# Altium PCB audiobound.PcbDoc
Units mm, origin at the board's own origin, x right, y up, seen from the top; angles counter-clockwise.
Board outline 98 x 55 mm, 2 copper layers (Top Layer, Bottom Layer), stack 1.214 mm thick; 79 components, 56 nets, 415 pads, 0 vias.
Unrouted connection lines stored in the file: 17.
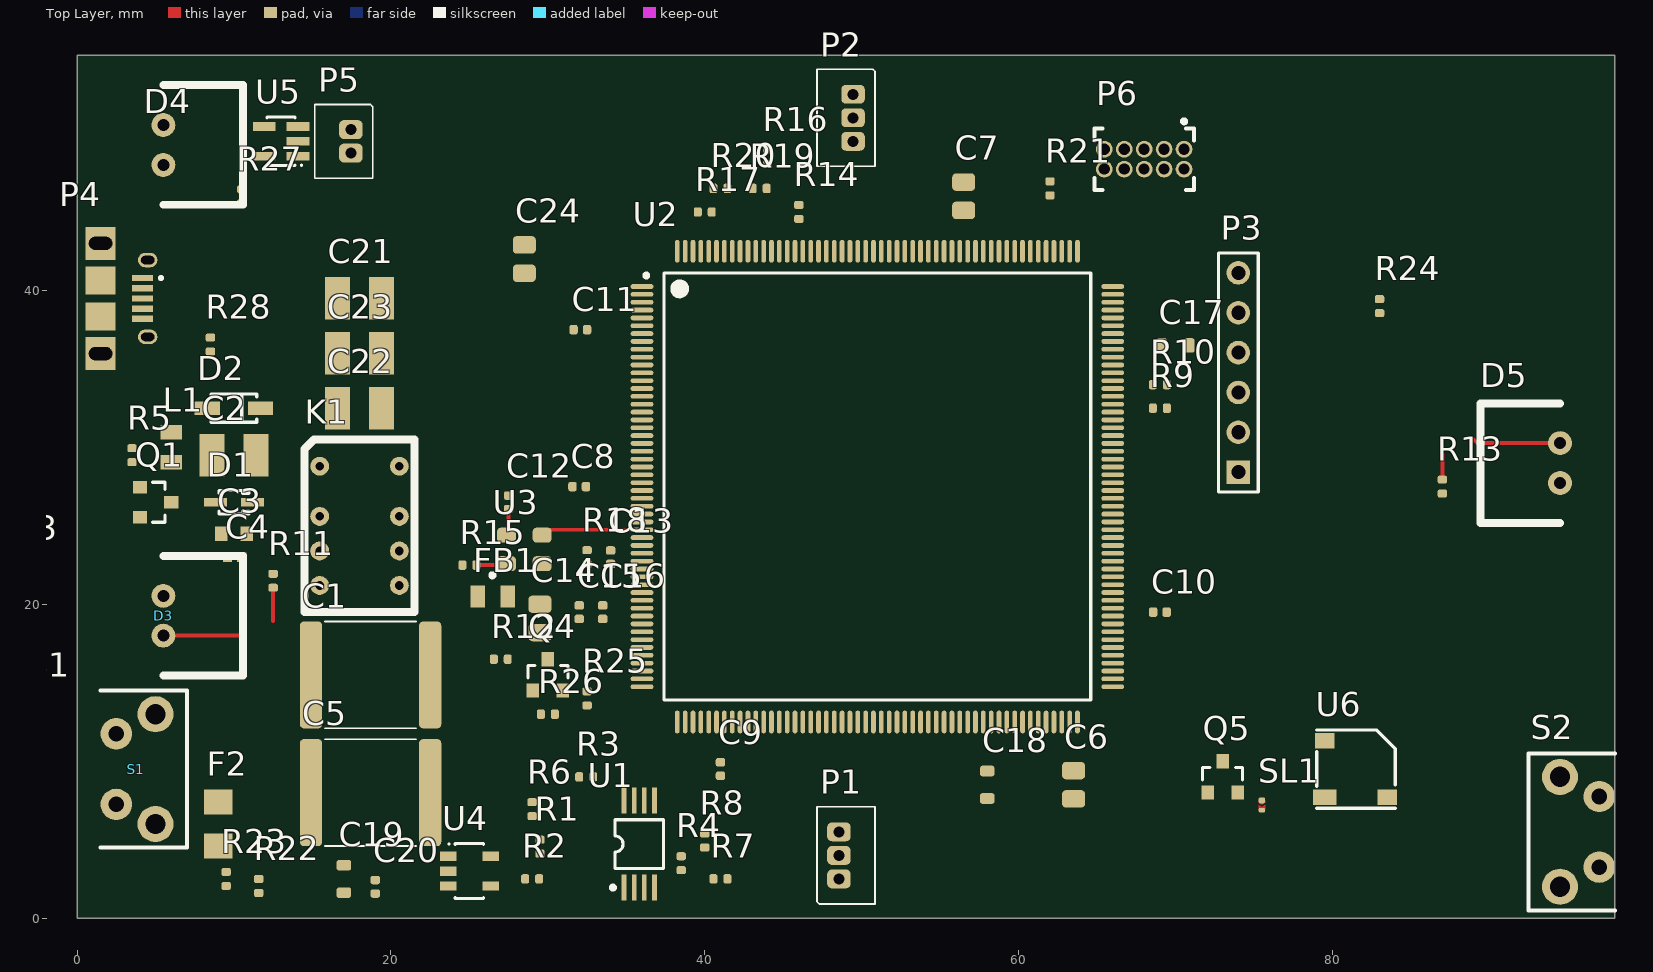
[diagram p0: Top Layer view]
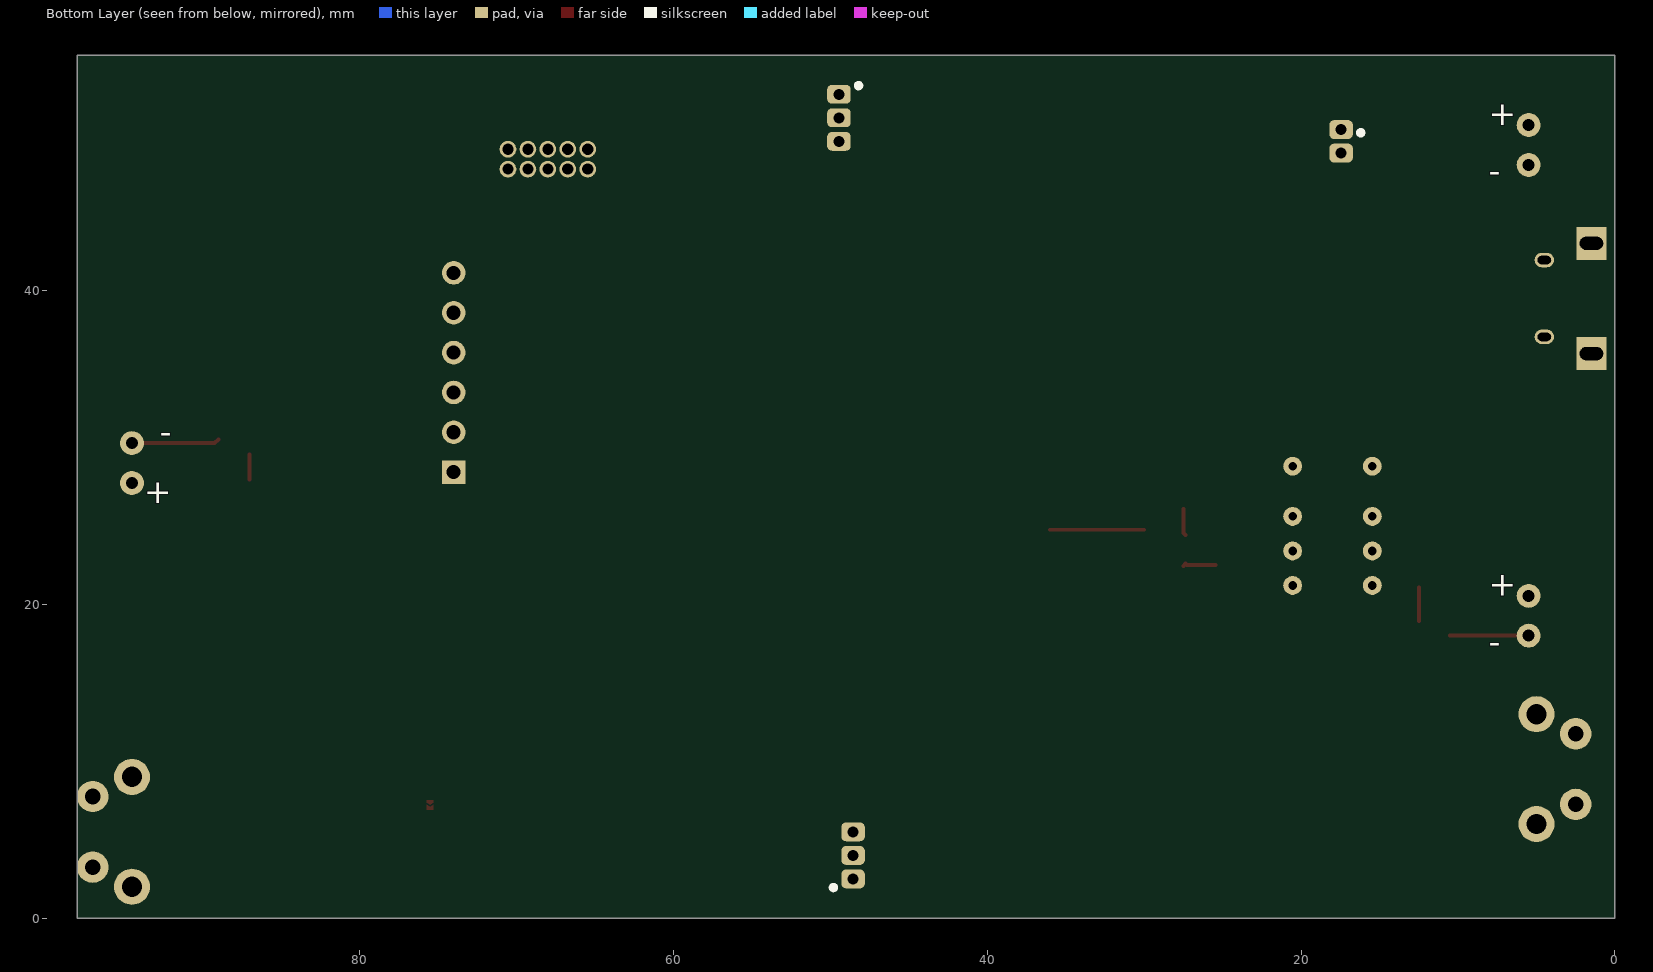
[diagram p1: Bottom Layer view, seen from below]

## Layer stack, top to bottom
Top Solder: solder mask 0.0102, Solder Resist, Dk 3.5
Top Layer: signal copper 0.0356
Dielectric1: core 1.143, FR-4, Dk 4.8
Bottom Layer: signal copper 0.0356
Bottom Solder: solder mask 0.0102, Solder Resist, Dk 3.5

## Board outline
0,0 98,0 98,55 0,55

## Design rules (kind name [scope] priority, off if disabled: settings)
Clearance [All] p1: gap=0.127 ignorepadtopadclearanceinfootprint=FALSE except(0: Arc-Hole Track-Hole SMDPad-Hole THPad-Hole Via-Hole Fill-Hole Poly-Hole Region-Hole Text-Hole)
ComponentClearance [All] p1 off: gap=0.254 collisioncheckmode=3 verticalgap=0.254 showdistances=FALSE
HoleSize [All] p1: absolutevalues=TRUE maxlimit=25.4 minlimit=0.254 maxpercent=80.000 minpercent=20.000
PolygonConnect [All] p1: connectstyle=Direct reliefconductorwidth=0.254 reliefentries=4 polygonreliefangle="90 Angle" airgapwidth=0.254
RoutingVias [All] p1: holewidth=0.711 width=1.27 viastyle="Through Hole" minholewidth=0.711 minwidth=1.27 maxholewidth=0.711 maxwidth=1.27
SilkToSolderMaskClearance SilkscreenOverComponentPads [IsPad] p1: minsilkscreentomaskgap=0.254 clearancetoexposedcopper=TRUE
SolderMaskExpansion [All] p1: expansion=0.102
Width [All] p1: maxlimit=500 minlimit=0.254 preferedwidth=0.254
27 further rules are at their usual default settings.

## Classes and differential pairs
component class main: C1 C2 C3 C4 C5 C21 C22 C23 D1 D2 K1 L1 P1 P2 Q1 R1 R2 R3 R4 R5 R6 R7 R8 SL1 U1
component class mcu: C6 C7 C8 C9 C10 C11 C12 C13 C14 C15 C16 C17 C18 D3 D5 FB1 P3 P6 Q4 Q5 R9 R10 R11 R12 R13 R14 R15 R16 R17 R18 R19 R20 R21 R24 R25 R26 S2 U2 U3 U6
component class power: C19 C20 C24 D4 F2 P4 P5 R22 R23 R27 R28 S1 U4 U5

## Components (designator, comment, footprint, x,y, rotation, side; value= is the part's Value field where it differs from the comment)
C1 "C7563X7S1C107M280LE" CAPC7563X300L40N 18.705,15.5 r180 top value=100uF
C2 "GRM32EC81C476KE15L" 1210 10,29.5 r0 top value=47uF
C3 "CL10A106MA8NRNC" 0603 10,24.5 r0 top value=10uF
C4 "GRM155R71C104KA88J" 0402 10.045,23 r180 top value=100nF
C5 "C7563X7S1C107M280LE" CAPC7563X300L40N 18.705,8 r180 top value=100uF
C6 "C2012X7S1A226M125" CAPC200X125X145L45N 63.5,8.5 r270 top value=22uF
C7 "C2012X7S1A226M125" CAPC200X125X145L45N 56.5,46 r90 top value=22uF
C8 "GCM155R71H104KE02" CAPC100X50X55L25N 32,27.5 r0 top value=100nF
C9 "GCM155R71H104KE02" CAPC100X50X55L25N 41,9.5 r90 top value=100nF
C10 "GCM155R71H104KE02" CAPC100X50X55L25N 69,19.5 r180 top value=100nF
C11 "GCM155R71H104KE02" CAPC100X50X55L25N 32.07,37.5 r0 top value=100nF
C12 "GCM155R71H104KE02" CAPC100X50X55L25N 27.5,26.5 r270 top value=100nF
C13 "GRM155R71H103KA88" CAPC100X50X55L25N 34,23 r90 top value=10nF
C14 "C2012X7S1A226M125" CAPC200X125X145L45N 29.5,19.1 r270 top value=22uF
C15 "GCM155R71H104KE02" CAPC100X50X55L25N 32,19.5 r90 top value=100nF
C16 "GRM155R71H103KA88" CAPC100X50X55L25N 33.5,19.5 r90 top value=10nF
C17 "C1608X7R1A225M080" CAPC160X80X90L20N 70,36.5 r180 top value=2.2uF
C18 "C1608X7R1A225M080" CAPC160X80X90L20N 58,8.5 r90 top value=2.2uF
C19 "C1608X7R1A225M080" CAPC160X80X90L20N 17,2.5 r90 top value=2.2uF
C20 "GRM155R71H103KA88" CAPC100X50X55L25N 19,2 r90 top value=10nF
C21 "GRM32EC81C476KE15L" 1210 18,39.5 r180 top value=47uF
C22 "GRM32EC81C476KE15L" 1210 18,32.5 r180 top value=47uF
C23 "GRM32EC81C476KE15L" 1210 18,36 r180 top value=47uF
C24 "C2012X7S1A226M125" CAPC200X125X145L45N 28.5,42 r90 top value=22uF
D1 "1N4448HWS-7-F" SOD323 10,26.5 r0 top
D2 "DDZ9694-7" SOD123 10,32.5 r0 top
D3 "5300H1" 5300Hx 5.5,19.27 r0 top
D4 "5300H3" 5300Hx 5.5,49.27 r0 top
D5 "5300H5" 5300Hx 94.5,29 r180 top
F2 "0ZCJ0020FF2E" 1206 9,6 r270 top
FB1 "742792031" 0805 26.5,20.5 r180 top value="300 Ohm @ 100 MHz"
K1 "IM01TS" IM01TS 18,25 r270 top
L1 "KLZ2012NHR101LTD25" 0805 6,30 r270 top value=100uH
P1 "B3B-ZR" B3B-ZR 49,4 r270 top
P2 "B3B-ZR" B3B-ZR 49,51 r90 top
P3 "PEC06SFAN" HDR1X6 74,28.42 r90 top
P4 "ZX62D-B-5PA8" ZX62D-B-5PA8 1.65,39.488 r270 top
P5 "B2B-ZR(LF)(SN)" B2B-ZR 17,49.5 r90 top
P6 "GRPB052VWVN" GRPB052VWVN 68,48.365 r270 top
Q1 "MMBT4401-7-F" SOT23 5,26.5 r270 top
Q4 "2N7002-7-F" SOT23 30,15.5 r0 top
Q5 "2N7002-7-F" SOT23 73,9 r0 top
R1 "ERJ-2RKF4700X" RESC1005X40N 29.5,4.555 r90 top value=470
R2 "ERJ-2RKF1001X" RESC1005X40N 29,2.5 r0 top value=1k
R3 "ERJ-2RKF1003X" RESC1005X40N 32.445,9 r0 top value=100k
R4 "ERJ-2RKF1002X" RESC1005X40N 38.5,3.5 r90 top value=10k
R5 "ERJ-2RKF3301X" RESC1005X40N 3.5,29.5 r90 top value=3.3k
R6 "ERJ-2RKF1003X" RESC1005X40N 29,6.945 r90 top value=100k
R7 "ERJ-2RKF1003X" RESC1005X40N 41,2.5 r0 top value=100k
R8 "ERJ-2RKF1001X" RESC1005X40N 40,4.945 r270 top value=1k
R9 "ERJ-2RKF2400X" RESC1005X40N 69,32.5 r0 top value=240
R10 "ERJ-2RKF2400X" RESC1005X40N 69,34 r0 top value=240
R11 "ERJ-2RKF2400X" RESC1005X40N 12.5,21.5 r90 top value=240
R12 "ERJ-2RKF2400X" RESC1005X40N 27,16.5 r0 top value=240
R13 "ERJ-2RKF2400X" RESC1005X40N 87,27.5 r270 top value=240
R14 "ERJ-2RKF1002X" RESC1005X40N 46,45 r90 top value=10k
R15 "ERJ-2RKF1002X" RESC1005X40N 25,22.5 r180 top value=10k
R16 "ERJ-2RKF1002X" RESC1005X40N 44,48.5 r90 top value=10k
R17 "ERJ-2RKF1002X" RESC1005X40N 40,45 r180 top value=10k
R18 "ERJ-2RKF1002X" RESC1005X40N 32.5,23 r270 top value=10k
R19 "ERJ-2RKF1002X" RESC1005X40N 43.5,46.5 r0 top value=10k
R20 "ERJ-2RKF1002X" RESC1005X40N 41,46.5 r180 top value=10k
R21 "ERJ-2RKF4701X" RESC1005X40N 62,46.5 r90 top value=4.7k
R22 "ERJ-2RKF1002X" RESC1005X40N 11.58,2.055 r90 top value=10k
R23 "ERJ-2RKF1002X" RESC1005X40N 9.5,2.5 r90 top value=10k
R24 "ERJ-2RKF1002X" RESC1005X40N 83,39 r90 top value=10k
R25 "ERJ-2RKF1000X" RESC1005X40N 32.5,14 r270 top value=100
R26 "ERJ-2RKF1002X" RESC1005X40N 30,13 r0 top value=10k
R27 "ERJ-2RKF4700X" RESC1005X40N 10.5,46 r90 top value=470
R28 "ERJ-2RKF2201X" RESC1005X40N 8.5,36.555 r270 top value=2.2k
S1 "EVQ-PF006K" EVQ-PF006K 2.5,9.5 r270 top
S2 "EVQ-PF006K" EVQ-PF006K 97,5.5 r90 top
SL1 "SOLDER_LINK_BRIDGED" SOLDERLINK0603X26N_BRIDGED 75.5,7.215 r90 top value=0
U1 "OP262" TSSOP8 35.825,4.725 r0 top
U2 "STM32F746BG" LQFP208 51,27.5 r0 top
U3 "KC3225A25.0000C3GE00" OSCCC320X250X80L75X100N 28.5,23.5 r0 top
U4 "LP3985IM5-3.0" DBV-5 25,3 r90 top
U5 "MCP73831T-2ACI/OT" SOT23-5 13,49.5 r90 top
U6 "CSS-0578" CSS-0578 81.5,9.5 r0 top

## Footprints (in the part's own frame and the unit in brackets; to place one, negate y for a bottom-side part, rotate by r counter-clockwise, add the part's x,y. Pads: shape width x height; smd on the part's side, far side on the other; paste and mask are expansions set on the pad)
0402 [mm] "SMD; Body 1 x 0.5 mm (LxW typ)"
  rect 0.59x0.6 smd: 1(-0.455,0) 2(0.455,0)
  body extent -0.5,-0.25 0.5,0.25, height 0.6
0603 [mm] "SMD; Body 1.6 x 0.9 mm (LxW typ)"
  rect 0.79x0.93 smd: 1(-0.82,0) 2(0.82,0)
  body extent -0.8,-0.4 0.8,0.4, height 0.9
0805 [mm] "SMD; Body 2 x 1.2 mm (LxW typ)"
  rect 0.92x1.38 smd: 1(-0.955,0) 2(0.955,0)
  body extent -1,-0.63 1,0.63, height 1.2
1206 [mm] "SMD; Body 3.1 x 1.6 mm (LxW typ)"
  rect 1.6x1.8 smd: 1(-1.4,0) 2(1.4,0)
  body extent -1.63,-0.79 1.57,0.81, height 1
1210 [mm] "SMD; Body 3.2 x 2.5 mm (LxW typ)"
  rect 1.6x2.7 smd: 1(-1.4,0) 2(1.4,0)
  body extent -1.6,-1.27 1.6,1.23, height 1.5
5300Hx [mil]
  round 60 hole 30: 1(0,50) 2(0,-50)
  silkscreen extent 0,-150 200,150, body extent -385,-117 145,117, height 235
B2B-ZR [mm]
  rrect50% 1.2x1.5 hole 0.7 paste-1.5 mask+0.05: 1(0.75,-0.45) 2(-0.75,-0.45)
  silkscreen extent -2.35,-1.85 2.35,1.85, body extent -2.25,-1.75 2.25,1.75, height 4.5
B3B-ZR [mm]
  rrect50% 1.2x1.5 hole 0.7 paste-1.5 mask+0.05: 1(1.5,-0.45) 2(0,-0.45) 3(-1.5,-0.45)
  silkscreen extent -3.1,-1.85 3.1,1.85, body extent -3,-1.75 3,1.75, height 4.5
CAPC100X50X55L25N [mm] "Capacitor, Chip; 1.00 mm L X 0.50 mm W X 0.55 mm H body"
  rrect52% 0.54x0.6 smd: 1(-0.43,0) 2(0.43,0)
  body extent -0.5,-0.25 0.5,0.25, height 0.55
CAPC160X80X90L20N [mm] "Capacitor, Chip; 1.60 mm L X 0.80 mm W X 0.90 mm H body"
  rrect50% 0.68x0.93 smd: 1(-0.875,0) 2(0.875,0)
  body extent -0.8,-0.4 0.8,0.4, height 0.9
CAPC200X125X145L45N [mm] "Capacitor, Chip; 2.00 mm L X 1.25 mm W X 1.45 mm H body"
  rrect45% 1.11x1.47 smd: 1(-0.9,0) 2(0.9,0)
  body extent -1,-0.63 1,0.63, height 1.45
CAPC7563X300L40N [mm] "Capacitor, Chip; 7.50 mm L X 6.30 mm W X 3.00 mm H body"
  rrect35% 1.42x6.81 smd: 1(-3.795,0) 2(3.795,0)
  silkscreen extent -2.91,-3.4 2.91,3.4, body extent -3.75,-3.15 3.75,3.15, height 3
CSS-0578 [mm] "Magnetic Buzzer"
  rect 1.5x1 smd paste-0.025 mask+0.07: 1(-2,-1.8)
  rect 1.25x1 smd paste-0.025 mask+0.07: 2(2,-1.8) 3(-2,1.8)
  silkscreen extent -2.5,-2.5 2.5,2.5, body extent -2.5,-2.5 2.5,2.5, height 3
DBV-5 [mm]
  rect 0.6x1.05 smd: 1(0.95,1.35) 2(0,1.35) 3(-0.95,1.35) 4(-0.95,-1.35) 5(0.95,-1.35)
  silkscreen extent -1.75,-0.9 1.77,1.35, body extent -1.5,-1.5 1.5,1.5, height 1.3
EVQ-PF006K [mm] "Light Touch Switch"
  round 2 hole 1: 1(-2.25,0) 2(2.25,0)
  round 2.3 hole 1.3: 3(-3.5,2.5) 3(3.5,2.5)
  silkscreen extent -5,-1 5,4.5, body extent -4.29,-5.85 4.29,4, height 7.4
GRPB052VWVN [mil] "Male Header, 0.050\" Pitch, 2x5 Position"
  round 42 hole 28 mask+2: 1(-25,100) 2(25,100) 3(-25,50) 4(25,50) 5(-25,0) 6(25,0) 7(-25,-50) 8(25,-50) 9(-25,-100) 10(25,-100)
  silkscreen extent -100,-125 77,125, body extent -67,-125 67,125, height 157
HDR1X6 [mm] "Connector; Header; 6 Position"
  rect 1.5x1.5 hole 0.9: 1(0,0)
  round 1.5 hole 0.9: 2(2.54,0) 3(5.08,0) 4(7.62,0) 5(10.16,0) 6(12.7,0)
  silkscreen extent -1.27,-1.27 13.97,1.27
IM01TS [mm]
  round 1.2 hole 0.55: 1(-3.8,-2.54) 2(-0.6,-2.54) 3(1.6,-2.54) 4(3.8,-2.54) 5(3.8,2.54) 6(1.6,2.54) 7(-0.6,2.54) 8(-3.8,2.54)
  silkscreen extent -5.5,-3.5 5.5,3.5, body extent -5,-3 5,3, height 4.65
LQFP208 [mm] "TSQFP, 208-Leads, Body 28.00x28.00mm, Pitch 0.50mm, IPC Medium Density"
  oval 1.45x0.3 smd: 1(-15,12.75) 2(-15,12.25) 3(-15,11.75) 4(-15,11.25) 5(-15,10.75) 6(-15,10.25) 7(-15,9.75) 8(-15,9.25) 9(-15,8.75) 10(-15,8.25) 11(-15,7.75) 12(-15,7.25) 13(-15,6.75) 14(-15,6.25) 15(-15,5.75) 16(-15,5.25) 17(-15,4.75) 18(-15,4.25) 19(-15,3.75) 20(-15,3.25) 21(-15,2.75) 22(-15,2.25) 23(-15,1.75) 24(-15,1.25) 25(-15,0.75) 26(-15,0.25) 27(-15,-0.25) 28(-15,-0.75) 29(-15,-1.25) 30(-15,-1.75) 31(-15,-2.25) 32(-15,-2.75) 33(-15,-3.25) 34(-15,-3.75) 35(-15,-4.25) 36(-15,-4.75) 37(-15,-5.25) 38(-15,-5.75) 39(-15,-6.25) 40(-15,-6.75) 41(-15,-7.25) 42(-15,-7.75) 43(-15,-8.25) 44(-15,-8.75) 45(-15,-9.25) 46(-15,-9.75) 47(-15,-10.25) 48(-15,-10.75) 49(-15,-11.25) 50(-15,-11.75) 51(-15,-12.25) 52(-15,-12.75) 105(15,-12.75) 106(15,-12.25) 107(15,-11.75) 108(15,-11.25) 109(15,-10.75) 110(15,-10.25) 111(15,-9.75) 112(15,-9.25) 113(15,-8.75) 114(15,-8.25) 115(15,-7.75) 116(15,-7.25) 117(15,-6.75) 118(15,-6.25) 119(15,-5.75) 120(15,-5.25) 121(15,-4.75) 122(15,-4.25) 123(15,-3.75) 124(15,-3.25) 125(15,-2.75) 126(15,-2.25) 127(15,-1.75) 128(15,-1.25) 129(15,-0.75) 130(15,-0.25) 131(15,0.25) 132(15,0.75) 133(15,1.25) 134(15,1.75) 135(15,2.25) 136(15,2.75) 137(15,3.25) 138(15,3.75) 139(15,4.25) 140(15,4.75) 141(15,5.25) 142(15,5.75) 143(15,6.25) 144(15,6.75) 145(15,7.25) 146(15,7.75) 147(15,8.25) 148(15,8.75) 149(15,9.25) 150(15,9.75) 151(15,10.25) 152(15,10.75) 153(15,11.25) 154(15,11.75) 155(15,12.25) 156(15,12.75)
  oval 0.3x1.45 smd: 53(-12.75,-15) 54(-12.25,-15) 55(-11.75,-15) 56(-11.25,-15) 57(-10.75,-15) 58(-10.25,-15) 59(-9.75,-15) 60(-9.25,-15) 61(-8.75,-15) 62(-8.25,-15) 63(-7.75,-15) 64(-7.25,-15) 65(-6.75,-15) 66(-6.25,-15) 67(-5.75,-15) 68(-5.25,-15) 69(-4.75,-15) 70(-4.25,-15) 71(-3.75,-15) 72(-3.25,-15) 73(-2.75,-15) 74(-2.25,-15) 75(-1.75,-15) 76(-1.25,-15) 77(-0.75,-15) 78(-0.25,-15) 79(0.25,-15) 80(0.75,-15) 81(1.25,-15) 82(1.75,-15) 83(2.25,-15) 84(2.75,-15) 85(3.25,-15) 86(3.75,-15) 87(4.25,-15) 88(4.75,-15) 89(5.25,-15) 90(5.75,-15) 91(6.25,-15) 92(6.75,-15) 93(7.25,-15) 94(7.75,-15) 95(8.25,-15) 96(8.75,-15) 97(9.25,-15) 98(9.75,-15) 99(10.25,-15) 100(10.75,-15) 101(11.25,-15) 102(11.75,-15) 103(12.25,-15) 104(12.75,-15) 157(12.75,15) 158(12.25,15) 159(11.75,15) 160(11.25,15) 161(10.75,15) 162(10.25,15) 163(9.75,15) 164(9.25,15) 165(8.75,15) 166(8.25,15) 167(7.75,15) 168(7.25,15) 169(6.75,15) 170(6.25,15) 171(5.75,15) 172(5.25,15) 173(4.75,15) 174(4.25,15) 175(3.75,15) 176(3.25,15) 177(2.75,15) 178(2.25,15) 179(1.75,15) 180(1.25,15) 181(0.75,15) 182(0.25,15) 183(-0.25,15) 184(-0.75,15) 185(-1.25,15) 186(-1.75,15) 187(-2.25,15) 188(-2.75,15) 189(-3.25,15) 190(-3.75,15) 191(-4.25,15) 192(-4.75,15) 193(-5.25,15) 194(-5.75,15) 195(-6.25,15) 196(-6.75,15) 197(-7.25,15) 198(-7.75,15) 199(-8.25,15) 200(-8.75,15) 201(-9.25,15) 202(-9.75,15) 203(-10.25,15) 204(-10.75,15) 205(-11.25,15) 206(-11.75,15) 207(-12.25,15) 208(-12.75,15)
  silkscreen extent -14.85,-13.6 13.6,13.6, body extent -15.31,-15.31 15.31,15.31, height 3.44
OSCCC320X250X80L75X100N [mm] "Oscillator, Corner Concave; 3.20 mm L X 2.50 mm W X 0.80 mm H body"
  rrect51% 1.2x0.95 smd: 1(-1.135,-0.91) 2(1.135,-0.91) 3(1.135,0.91) 4(-1.135,0.91)
  silkscreen extent -2.16,-1.78 -1.91,-1.52, body extent -1.6,-1.25 1.6,1.25, height 0.8
RESC1005X40N [mm] "Resistor, Chip; 1.00 mm L X 0.50 mm W X 0.40 mm H body"
  rrect50% 0.51x0.6 smd: 1(-0.445,0) 2(0.445,0)
  body extent -0.5,-0.25 0.5,0.25, height 0.4
SOD123 [mm] "SOD-123; 2 Leads; Body 2.7 x 1.6 mm, (LxW)"
  rect 1.6x0.85 smd: 1(-1.7,0) 2(1.7,0)
  silkscreen extent -1.45,-0.9 1.45,0.9, body extent -1.92,-0.85 1.92,0.85, height 1.45
SOD323 [mm] "SOD-323/SC-76; 2 Leads; Body 1.7 x 1.3 mm, (LxW)"
  rect 1.45x0.55 smd: A(-1.175,0) K(1.175,0)
  silkscreen extent -0.95,-0.75 0.95,0.75, body extent -1.35,-0.7 1.25,0.65, height 1.1
SOLDERLINK0603X26N_BRIDGED [mm] "Resistor, Chip; Bridged; 0.60 mm L X 0.30 mm W X 0.26 mm H body"
  rrect50% 0.27x0.4 smd paste-0.4 mask+0.05: 1(-0.335,0)
  rrect50% 0.37x0.4 smd paste-0.4 mask+0.05: 2(0.285,0)
  Top Layer region: 0.138,0.2 0.012,0 0.138,-0.2 0.298,-0.2 0.298,0.2
  Top Layer region: 0.013,-0.2 -0.112,0 0.013,0.2 -0.298,0.2 -0.298,-0.2
SOT23 [mm] "SOT-23; 3 Leads; Body 3.0 x 2.5 mm, inc. leads (LxW max)"
  rect 0.8x0.9 smd: 1(-0.95,-1) 2(0.95,-1) 3(0,1)
  silkscreen extent -1.27,-0.2 1.28,0.6, body extent -1.46,-1.14 1.46,1.2, height 1
SOT23-5 [mm] "SOT-23/SC-74A; 5 Leads; Body 3 x 3 mm, inc. leads (LxW max)"
  rect 0.55x1.45 smd: 1(-0.95,-1.075) 2(0,-1.075) 3(0.95,-1.075) 4(0.95,1.075) 5(-0.95,1.075)
  silkscreen extent -1.57,-1.35 1.55,0.9, body extent -1.45,-1.4 1.45,1.4, height 1.45
TSSOP8 [mm] "Thin-Shrink Small Outline Package, 8-pin"
  rect 0.3x1.65 smd: 1(-0.975,-2.775) 2(-0.325,-2.775) 3(0.325,-2.775) 4(0.975,-2.775) 5(0.975,2.775) 6(0.325,2.775) 7(-0.325,2.775) 8(-0.975,2.775)
  silkscreen extent -1.8,-2.9 1.55,1.55, body extent -1.55,-3.2 1.55,3.2, height 1.1
ZX62D-B-5PA8 [mm] "USB Micro-B SMD Connector"
  rect 0.4x1.35 smd: 1(-1.3,2.525) 2(-0.65,2.525) 3(0,2.525) 4(0.65,2.525) 5(1.3,2.525)
  rect 2.1x1.9 hole 0.825 slot 1.5 at 90 deg: 6(-3.512,-0.15) 9(3.512,-0.15)
  rect 1.8x1.9 smd: 7(-1.15,-0.15) 8(1.15,-0.15)
  oval 0.925x1.25 hole 0.525 slot 0.85 at 90 deg: 10(-2.45,2.85) 11(2.45,2.85)
  silkscreen extent -1.4,3.6 -1.2,3.8, body extent -4.05,-2.9 4.05,2.9, height 2.75

## Part data
C1 C5: library part CAP, "Ceramic Capacitor 100uF ±20% 16V X7S 3025", Manufacturer=TDK, Package=3025, Tolerance=±20%, Voltage=16V, Manufacturer P/N=C7563X7S1C107M280LE, Tr=-55:125
C2 C21 C22 C23: library part CAP, "Ceramic Capacitor 47uF ±10% 16V X6S 1210", Manufacturer=Murata, Package=1210, Tolerance=±10%, Voltage=16V, Manufacturer P/N=GRM32EC81C476KE15L, Tr=-55:105
C3: library part "CAP 0603", "Ceramic Capacitor 10uF ±20% 25V X5R 0603", Manufacturer=Samsung, Package=0603, Tolerance=±20%, Voltage=25V, Manufacturer P/N=CL10A106MA8NRNC, Tr=-55:85
C4: library part "CAP 0402", "Ceramic Capacitor 100nF ±10% 16V X7R 0402", Manufacturer=Murata, Package=0402, Tolerance=±10%, Voltage=16V, Manufacturer P/N=GRM155R71C104KA88J, Tr=-55:125
C6 C7 C14 C24: library part CAP, "Ceramic Capacitor 22uF ±20% 10V X7S 0805", Manufacturer=TDK, Package=0805, Tolerance=±20%, Voltage=10V, Manufacturer P/N=C2012X7S1A226M125, Tr=-55:125
C8 C9 C10 C11 C12 C15: library part CAP, "Ceramic Capacitor 100nF ±10% 50V X7R 0402", Manufacturer=Murata, Package=0402, Tolerance=±10%, Voltage=50V, Manufacturer P/N=GCM155R71H104KE02, Tr=-55:125
C13 C16 C20: library part CAP, "Ceramic Capacitor 10nF ±10% 50V X7R 0402", Manufacturer=Murata, Package=0402, Tolerance=±10%, Voltage=50V, Manufacturer P/N=GRM155R71H103KA88, Tr=-55:125
C17 C18 C19: library part CAP, "Ceramic Capacitor 2.2uF ±20% 10V X7R 0603", Manufacturer=TDK, Package=0603, Tolerance=±20%, Voltage=10V, Manufacturer P/N=C1608X7R1A225M080, Tr=-55:125
D1: "Schottky Diode 80V 250mA SOD323", Manufacturer="Diodes, Inc.", Alternative P/N=1N4448, Manufacturer P/N=1N4448HWS-7-F
D2: "Zener Diode 8.2V 500mW SOD123", Manufacturer="Diodes, Inc.", Package=SOD123, Manufacturer P/N=DDZ9694-7, Vz=8.2V
D3: library part LED0603RD, "LED, Color Red, 10mA, 2.0V", Manufacturer="Visual Communications Company", Manufacturer P/N=5300H1
D4: library part LED0603RD, "LED, Color Amber, 10mA, 2.0V", Manufacturer="Visual Communications Company", Manufacturer P/N=5300H3
D5: library part LED0603RD, "LED, Color Green, 10mA, 2.2V", Manufacturer="Visual Communications Company", Manufacturer P/N=5300H5
F2: "PTC Resettable Fuse, 0.2A, 30V, SMD 1206", Manufacturer="Bell Fuse", Manufacturer P/N=0ZCJ0020FF2E
FB1: library part INDUCTOR, "Ferrite Chip 300 Ohm @ 100MHz; 3A", Manufacturer="Wurth Electronics, Inc", Package=0805, I(sat)=3A, Manufacturer P/N=742792031
K1: "Dual-Pole Dual-Throw Relay", Manufacturer=IM01TS
L1: library part INDUCTOR, "Inductor 100uH ±20% 140mA 0805", Manufacturer=TDK, Package=0805, Tolerance=±20%, I(sat)=0.03, Manufacturer P/N=KLZ2012NHR101LTD25, Tr=-55:150
P1 P2: library part "Header 3", "Header, 3-Pin", Manufacturer=JST, Manufacturer P/N=B3B-ZR
P3: library part "Header 6", "Header, 6-Pin", Manufacturer=Sullins, Do Not Place=DNP, Manufacture P/N=PEC06SFAN
P4: "USB Micro-B SMD Connector", Manufacturer=Hirose, Manufacturer P/N=ZX62D-B-5PA8
P5: library part "Header 2", "Header, 2-Pin", Manufacturer=JST, Manufacturer P/N=B2B-ZR(LF)(SN)
P6: "Male Header, 0.050\" Pitch, 2x5 Position, Right Angle", Manufacturer=Sullins, Manufacturer P/N=GRPB052MWCN, Do Not Place=DNP
Q1: "NPN Small Signal Transistor SMD SOT-23", Manufacturer="Diodes, Inc.", Manufacturer P/N=MMBT4401-7-F
Q4 Q5: "N-Channel Enhancement Mode MOSFET", Manufacturer="Diodes, Inc.", Manufacturer P/N=2N7002-7-F
R1 R27: library part RES, "Thick Film Resistor 470 ±1% 0.1W 50V 0402", Manufacturer=Panasonic, Package=0402, Power=0.1, Tolerance=±1%, Voltage=50, Manufacturer P/N=ERJ-2RKF4700X, Tcr=±100, Tr=-55:155
R2 R8: library part RES, "Thick Film Resistor 1k ±1% 0.1W 50V 0402", Manufacturer=Panasonic, Package=0402, Power=0.1, Tolerance=±1%, Voltage=50, Manufacturer P/N=ERJ-2RKF1001X, Tcr=±100, Tr=-55:155
R3 R6 R7: library part RES, "Thick Film Resistor 100k ±1% 0.1W 50V 0402", Manufacturer=Panasonic, Package=0402, Power=0.1, Tolerance=±1%, Voltage=50, Manufacturer P/N=ERJ-2RKF1003X, Tcr=±100, Tr=-55:155
R4 R14 R15 R16 R17 R18 R19 R20 R22 R23 R24 R26: library part RES, "Thick Film Resistor 10k ±1% 0.1W 50V 0402", Manufacturer=Panasonic, Package=0402, Power=0.1, Tolerance=±1%, Voltage=50, Manufacturer P/N=ERJ-2RKF1002X, Tcr=±100, Tr=-55:155
  R16 R20: Do Not Place=DNP
R5: library part RES, "Thick Film Resistor 3.3k ±1% 0.1W 50V 0402", Manufacturer=Panasonic, Package=0402, Power=0.1, Tolerance=±1%, Voltage=50, Manufacturer P/N=ERJ-2RKF3301X, Tcr=±100, Tr=-55:155
R9 R10 R11 R12 R13: library part RES, "Thick Film Resistor 240 ±1% 0.1W 75V 0402", Manufacturer=Panasonic, Package=0402, Power=0.1, Tolerance=±1%, Voltage=75, Manufacturer P/N=ERJ-2RKF2400X, Tcr=±100, Tr=-55:155
R21: library part RES, "Thick Film Resistor 4.7k ±1% 0.1W 75V 0402", Manufacturer=Panasonic, Package=0402, Power=0.1, Tolerance=±1%, Voltage=75, Manufacturer P/N=ERJ-2RKF4701X, Tcr=±100, Tr=-55:155
R25: library part RES, "Thick Film Resistor 100 ±1% 0.1W 75V 0402", Manufacturer=Panasonic, Package=0402, Power=0.1, Tolerance=±1%, Voltage=75, Manufacturer P/N=ERJ-2RKF1000X, Tcr=±100, Tr=-55:155
R28: library part RES, "Thick Film Resistor 2.2k ±1% 0.1W 50V 0402", Manufacturer=Panasonic, Package=0402, Power=0.1, Tolerance=±1%, Voltage=50, Manufacturer P/N=ERJ-2RKF2201X, Tcr=±100, Tr=-55:155
S1 S2: "Tactile Switch; Normally Open", Manufacturer=Panasonic, Manufacturer P/N=EVQ-PF006K
SL1: library part RES, "Solder Link Bridged"
U1: "Dual 15 MHz Rail-to-Rail Op Amp", Manufacturer="Analog Devices", Manufacturer P/N=OP262HRU
U2: library part STM32F746BGT6, "STM32 Microcontroller", Manufacturer="ST Microelectronics", Manufacturer P/N=STM32F746BG
U3: library part OSC_25M_NZ2520SB, "Oscillator 25.00Mhz, -+50PPM, 3.3V", Manufacturer=Kyocera, Manufacturer P/N=KC3225A25.0000C3GE00
U4: library part LP3985IM5-2.5, "Low Dropout Regulator, Fixed, 150mA, 30uV Low Noise, 3.0V", Manufacturer="Texas Instruments", Voltage=3.0V, Manufacturer P/N=LP3985IM5-3.0
U5: "Single-Cell LiPo Charger", Manufacturer=Microchip, Manufacturer P/N=MCP73831T-2ACI/OT
U6: "Magnetic Buzzer", Manufacturer=CUI, Manufacturer P/N=CSS-0578

## Nets (pads, with @x,y where several pads share a name; then routed paths per layer and width w, separated by ;. In a path a pad name is that pad's centre, name@x,y a point inside that pad or via, vN(x,y) a via of type N, cw(c..) or ccw(c..) an arc to the next point about the centre after c; other vN are vias at no path point)
ADC: R7.1 U1.7 U2.50
BAT-SNS: Q4.2 R25.1 U2.44
BAT-SNS-EN: Q4.1 R26.1 U2.45
BOOST: R5.2 U2.56
BOOT: R16.1 R19.2 U2.197
BUZZER: Q5.1 U2.100
CAL: R24.1 S2.1 U2.43
DAC: U1.3 U2.53
GND: C2.1 C3.1 C4.2 C6.2 C7.2 C8.1 C9.1 C10.1 C11.1 C12.1 C13.1 C14.2 C15.1 C16.1 C17.1 C18.1 C20.1 C21.1 C22.1 C23.1 C24.2 D2.1 K1.8 P1.3 P2.3 P3.6 P4.5 P4.6 P4.7 P4.8 P4.9 P4.10 P4.11 P5.2 P6.1 Q1.2 Q5.2 R6.1 R8.1 R11.2 R13.2 R19.1 R20.1 R22.1 R23.2 R24.2 R25.2 R26.2 R28.2 S1.3 S2.3 U1.4 U2.14 U2.25 U2.40 U2.51 U2.60 U2.72 U2.82 U2.93 U2.114 U2.125 U2.136 U2.149 U2.170 U2.184 U2.202 U3.2 U4.2 U5.2
JTRST_N: R14.1 U2.193
KICK-ON-OFF: C19.1 R22.2 U2.199 U4.3
MCU_LED0: D3.1 U2.61
MCU_LED1: D5.1 U2.62
MCU_OSC: U2.32 U3.3 | length 6
  Top Layer w0.254: U3.3@30,24.75 U2.32
MCU_RST_N: C13.2 R18.1 U2.34
MIC: C5.2 K1.4 SL1.2
MOM-ON-OFF: C19.2 R23.1 S1.2 U2.90
NetC1_2: C1.2 U1.1 U1.2
NetC5_1: C5.1 R3.1 R6.2 U1.5
NetC14_1: C14.1 C15.2 C16.2 FB1.1 U2.41 U2.42
NetC17_2: C17.2 U2.148
NetC18_2: C18.2 U2.92
NetC20_2: C20.2 U4.4
NetC24_1: C24.1 D4.1 P4.1 U5.4
NetD1_A: D1.A L1.2 Q1.3
NetD3_2: D3.2 R11.1 | length 7.1
  Top Layer w0.254: D3.2 10.5,18 ; 12.5,18.95 R11.1
NetD4_2: D4.2 R27.1
NetD5_2: D5.2 R13.1 | length 7.2
  Top Layer w0.254: R13.1 87,29.55 ; 89,30.5 89.23,30.27 D5.2
NetK1_2: K1.2 K1.7
NetK1_3: K1.3 P1.2
NetK1_6: K1.6 P2.2
NetP3_2: P3.2 R9.2
NetP3_3: P3.3 R10.2
NetQ1_1: Q1.1 R5.1
NetQ4_3: Q4.3 R12.2
NetQ5_3: Q5.3 U6.2
NetR1_1: R1.1 SL1.1
NetR2_1: R2.1 R4.2 R8.2
NetR4_1: R4.1 R7.2 U1.6
NetR15_1: R15.1 U3.1 | length 2.1
  Top Layer w0.254: R15.1 27.275,22.5 U3.1 U3.1@27.5,22.455
NetR27_2: R27.2 U5.1
NetR28_1: R28.1 U5.5
OUTPUT: C1.1 K1.5
PDR_ON: R17.1 R20.2 U2.203
PTT: P1.1 P2.1
RELAY: C21.2 C22.2 C23.2 K1.1 U2.194 U2.195 U2.196 U2.198
TCK: P6.6 U2.159
TDI: P6.10 R21.1 U2.160
TDO: P6.8 U2.192
TMS: P6.4 U2.147
USART1_RX: R10.1 U2.144
USART1_TX: R9.1 U2.143
V3: C6.1 C7.1 C8.2 C9.2 C10.2 C11.2 C12.2 FB1.2 L1.1 P6.2 R2.2 R3.2 R14.2 R15.2 R16.2 R17.2 R18.2 R21.2 S2.2 U1.8 U2.6 U2.15 U2.26 U2.39 U2.52 U2.59 U2.73 U2.83 U2.94 U2.103 U2.115 U2.124 U2.137 U2.150 U2.158 U2.171 U2.185 U2.204 U3.4 U4.5 U6.1 | length 1.7
  Top Layer w0.254: U3.4 27.5,24.545 C12.2
V8V2: C2.2 C3.2 C4.1 D1.K D2.2 R1.2
VBAT: F2.2 P5.1 U5.3
VBAT-FUSED: F2.1 R12.1 S1.1 U4.1
pads on no net: P3.1 P3.4 P3.5 P4.2 P4.3 P4.4 P6.3 P6.5 P6.7 P6.9 U2.1 U2.2 U2.3 U2.4 U2.5 U2.7 U2.8 U2.9 U2.10 U2.11 U2.12 U2.13 U2.16 U2.17 U2.18 U2.19 U2.20 U2.21 U2.22 U2.23 U2.24 U2.27 U2.28 U2.29 U2.30 U2.31 U2.33 U2.35 U2.36 U2.37 U2.38 U2.46 U2.47 U2.48 U2.49 U2.54 U2.55 U2.57 U2.58 U2.63 U2.64 U2.65 U2.66 U2.67 U2.68 U2.69 U2.70 U2.71 U2.74 U2.75 U2.76 U2.77 U2.78 U2.79 U2.80 U2.81 U2.84 U2.85 U2.86 U2.87 U2.88 U2.89 U2.91 U2.95 U2.96 U2.97 U2.98 U2.99 U2.101 U2.102 U2.104 U2.105 U2.106 U2.107 U2.108 U2.109 U2.110 U2.111 U2.112 U2.113 U2.116 U2.117 U2.118 U2.119 U2.120 U2.121 U2.122 U2.123 U2.126 U2.127 U2.128 U2.129 U2.130 U2.131 U2.132 U2.133 U2.134 U2.135 U2.138 U2.139 U2.140 U2.141 U2.142 U2.145 U2.146 U2.151 U2.152 U2.153 U2.154 U2.155 U2.156 U2.157 U2.161 U2.162 U2.163 U2.164 U2.165 U2.166 U2.167 U2.168 U2.169 U2.172 U2.173 U2.174 U2.175 U2.176 U2.177 U2.178 U2.179 U2.180 U2.181 U2.182 U2.183 U2.186 U2.187 U2.188 U2.189 U2.190 U2.191 U2.200 U2.201 U2.205 U2.206 U2.207 U2.208 U6.3

## Silkscreen, mask and mechanical layers (free items; w line width, h text height)
Mechanical 2:
  the board outline again, w0.508
Mechanical 10:
  text "1. FRONT ASSEMBLY NOTE #1" at 53.34,132.08 h1.14
Mechanical 16:
  lines w0.127: -58,-3.025 -52.92,-3.025 ; -58,50.95 -52.92,50.95 ; -58,104.925 -52.92,104.925 ; 11.85,-57 11.85,-51.92 ; 11.85,153.82 11.85,158.9 ; 30.9,-51.92 30.9,-21.44 66.46,-21.44 ; 30.9,-30.584 66.46,-30.584 ; 32.17,-33.886 42.33,-33.886 ; 37.631,-40.998 38.393,-40.998 ; 37.631,-40.363 38.393,-40.363 ; 37.631,-38.458 38.393,-38.458 ; 37.631,-37.823 38.393,-37.823 ; 37.631,-35.918 38.393,-35.918 ; 37.631,-35.283 38.393,-35.283 ; 81.7,-57 81.7,-51.92 ; 81.7,153.82 81.7,158.9 ; 102.02,-44.3 216.32,-44.3 ; 102.02,-36.68 216.32,-36.68 ; 102.02,-29.06 140.12,-29.06 ; 102.02,143.66 216.32,143.66 ; 102.02,148.74 216.32,148.74 ; 102.02,153.82 102.02,138.58 216.32,138.58 ; 117.26,138.58 117.26,153.82 ; 129.96,138.58 129.96,153.82 ; 140.12,-51.92 140.12,-36.68 140.12,-21.44 ; 151.55,-57 151.55,-51.92 ; 151.55,153.82 151.55,158.9 ; 193.46,-51.92 193.46,-36.68 ; 200.445,138.58 200.445,153.82 ; 216.32,-3.025 221.4,-3.025 ; 216.32,50.95 221.4,50.95 ; 216.32,104.925 221.4,104.925 ; 66.46,-21.44 66.46,-51.92 102.02,-51.92 ; 66.46,-21.44 102.02,-21.44 ; 102.02,-51.92 102.02,-21.44 ; 102.02,-51.92 216.32,-51.92 ; 102.02,-21.44 140.12,-21.44 ; 140.12,-21.44 216.32,-21.44 216.32,-51.92 ; 216.32,-51.92 216.32,153.82 -52.92,153.82 -52.92,-51.92 216.32,-51.92 ; -58,-57 -58,158.9 221.4,158.9 221.4,-57 -58,-57
  lines w0.178: 38.012,-40.744 38.012,-39.982 ; 38.012,-38.204 38.012,-37.442 ; 38.012,-35.664 38.012,-34.902
  text "1" at -23.676,155.471 h1.78
  text "2" at 46.191,155.471 h1.78
  text "3" at 115.914,155.471 h1.78
  text "4" at 185.789,155.471 h1.78
  text "REV" at 103.29,150.01 h1.7
  text "DATE" at 118.53,150.01 h1.7
  text "DESC" at 131.23,150.01 h1.7
  text "ENG" at 202.35,150.01 h1.7
  text "1" at 103.29,144.93 h1.7
  text "10/9/17" at 118.53,144.93 h1.7
  text "INITIAL RELEASE" at 131.23,144.93 h1.7
  text "J. Brinton" at 202.35,144.93 h1.7
  text "A" at -56.095,129.614 h1.78
  text "A" at 218.225,129.614 h1.78
  text "B" at -56.095,75.639 h1.78
  text "B" at 218.225,75.639 h1.78
  text "C" at -56.095,21.664 h1.78
  text "C" at 218.225,21.664 h1.78
  text "ENGINEER:" at 103.29,-23.98 h1.14
  text "TITLE:" at 141.39,-23.98 h1.14
  text "Brinton Engineering, LLC" at 69,-25 h1.78
  text "ALL DIMENSIONS ARE IN MM (INCHES)" at 32.805,-25.885 h1.2
  text "J. Brinton" at 103.29,-27.155 h1.78
  text "3479 Edison Way" at 69,-30 h1.78
  text "TOLERANCES:" at 43.854,-30.076 h1.2
  text "AudioBound" at 142.025,-30.965 h2.2
  text "PCB DESIGNER:" at 103.29,-31.473 h1.14
  text "D" at -56.095,-32.184 h1.78
  text "D" at 218.225,-32.184 h1.78
  text "DECIMALS" at 32.805,-32.87 h1.2
  text "J. Brinton" at 103.29,-34.775 h1.78
  text "Menlo Park CA 94025" at 69,-35 h1.78
  text ".X     0.1" at 32.805,-36.045 h1.2
  text ".XX    0.05" at 32.805,-38.585 h1.2
  text "DATE:" at 103.29,-39.22 h1.14
  text "PART NO.:" at 141.39,-39.22 h1.14
  text "REV:" at 194.73,-39.22 h1.14
  text ".XXX   0.005" at 32.805,-41.125 h1.2
  text "10/9/2017" at 103.29,-42.395 h1.7
  text "-" at 141.39,-42.395 h1.78
  text "1" at 194.73,-42.395 h1.78
  text "*UNLESS OTHERWISE NOTED" at 32.17,-46.84 h1.2
  text "FILE NAME:" at 103.29,-46.84 h1.14
  text "DWG NO:" at 141.39,-46.84 h1.14
  text "SCALE:" at 194.73,-46.84 h1.14
  text ".PCB_FILE_NAME_NO_PATH" at 104.56,-49.888 h1.78
  text "-" at 141.39,-50.015 h1.78
  text "1:1" at 194.73,-50.015 h1.78
  text "1" at -23.676,-55.349 h1.78
  text "2" at 46.191,-55.349 h1.78
  text "3" at 115.914,-55.349 h1.78
  text "4" at 185.789,-55.349 h1.78
Drill Drawing:
  text "1. LEAD-FREE HASL" at 53.34,132.08 h1.14
  text "2. SOLDERMASK: GREEN" at 53.34,129.54 h1.14
  text "3. SILKSCREEN: WHITE" at 53.34,127 h1.14
  text ".Legend" at 102.235,111.76 h1.2
Mechanical 26:
  text "1. BOTTOM ASSEMBLY NOTE #1" at 101.6,134.62 h1.14
Mechanical 27:
  text "1. BOTTOM CONFORMAL COAT NOTE #1" at 101.6,132.715 h1.14
Mechanical 32:
  lines w0.127: -58,-3.025 -52.92,-3.025 ; -58,50.95 -52.92,50.95 ; -58,104.925 -52.92,104.925 ; -52.92,-44.3 61.38,-44.3 ; -52.92,-36.68 61.38,-36.68 ; -52.92,138.58 61.38,138.58 61.38,153.82 ; -52.92,143.66 61.38,143.66 ; -52.92,148.74 61.38,148.74 ; -37.045,138.58 -37.045,153.82 ; -30.06,-51.92 -30.06,-36.68 ; 11.85,-57 11.85,-51.92 ; 11.85,153.82 11.85,158.9 ; 23.28,-51.92 23.28,-36.68 23.28,-21.44 ; 23.28,-29.06 61.38,-29.06 ; 33.44,138.58 33.44,153.82 ; 46.14,138.58 46.14,153.82 ; 81.7,-57 81.7,-51.92 ; 81.7,153.82 81.7,158.9 ; 96.94,-30.584 132.5,-30.584 ; 121.07,-33.886 131.23,-33.886 ; 125.007,-40.998 125.769,-40.998 ; 125.007,-40.363 125.769,-40.363 ; 125.007,-38.458 125.769,-38.458 ; 125.007,-37.823 125.769,-37.823 ; 125.007,-35.918 125.769,-35.918 ; 125.007,-35.283 125.769,-35.283 ; 132.5,-51.92 132.5,-21.44 96.94,-21.44 ; 151.55,-57 151.55,-51.92 ; 151.55,153.82 151.55,158.9 ; 216.32,-3.025 221.4,-3.025 ; 216.32,50.95 221.4,50.95 ; 216.32,104.925 221.4,104.925 ; -52.92,-51.92 -52.92,153.82 216.32,153.82 216.32,-51.92 -52.92,-51.92 ; -52.92,-51.92 -52.92,-21.44 23.28,-21.44 ; -52.92,-51.92 61.38,-51.92 ; 23.28,-21.44 61.38,-21.44 ; 61.38,-51.92 61.38,-21.44 ; 61.38,-51.92 96.94,-51.92 96.94,-21.44 ; 61.38,-21.44 96.94,-21.44 ; -58,-57 -58,158.9 221.4,158.9 221.4,-57 -58,-57
  lines w0.178: 125.388,-40.744 125.388,-39.982 ; 125.388,-38.204 125.388,-37.442 ; 125.388,-35.664 125.388,-34.902
  text "4" at -22.389,155.471 h1.78
  text "3" at 47.486,155.471 h1.78
  text "2" at 117.209,155.471 h1.78
  text "1" at 187.076,155.471 h1.78
  text "ENG" at -38.95,150.01 h1.7
  text "DESC" at 32.17,150.01 h1.7
  text "DATE" at 44.87,150.01 h1.7
  text "REV" at 60.11,150.01 h1.7
  text "J. Brinton" at -38.95,144.93 h1.7
  text "INITIAL RELEASE" at 32.17,144.93 h1.7
  text "10/9/17" at 44.87,144.93 h1.7
  text "1" at 60.11,144.93 h1.7
  text "A" at -54.825,129.614 h1.78
  text "A" at 219.495,129.614 h1.78
  text "B" at -54.825,75.639 h1.78
  text "B" at 219.495,75.639 h1.78
  text "C" at -54.825,21.664 h1.78
  text "C" at 219.495,21.664 h1.78
  text "TITLE:" at 22.01,-23.98 h1.14
  text "ENGINEER:" at 60.11,-23.98 h1.14
  text "Brinton Engineering, LLC" at 94.4,-25 h1.78
  text "ALL DIMENSIONS ARE IN MM (INCHES)" at 130.595,-25.885 h1.2
  text "J. Brinton" at 60.11,-27.155 h1.78
  text "3479 Edison Way" at 94.4,-30 h1.78
  text "TOLERANCES:" at 119.546,-30.076 h1.2
  text "AudioBound" at 21.375,-30.965 h2.2
  text "PCB DESIGNER:" at 60.11,-31.473 h1.14
  text "D" at -54.825,-32.184 h1.78
  text "D" at 219.495,-32.184 h1.78
  text "DECIMALS" at 130.595,-32.87 h1.2
  text "J. Brinton" at 60.11,-34.775 h1.78
  text "Menlo Park CA 94025" at 94.4,-35 h1.78
  text ".X     0.1" at 130.595,-36.045 h1.2
  text ".XX    0.05" at 130.595,-38.585 h1.2
  text "REV:" at -31.33,-39.22 h1.14
  text "PART NO.:" at 22.01,-39.22 h1.14
  text "DATE:" at 60.11,-39.22 h1.14
  text ".XXX   0.005" at 130.595,-41.125 h1.2
  text "1" at -31.33,-42.395 h1.78
  text "-" at 22.01,-42.395 h1.78
  text "10/9/2017" at 60.11,-42.395 h1.7
  text "SCALE:" at -31.33,-46.84 h1.14
  text "DWG NO:" at 22.01,-46.84 h1.14
  text "FILE NAME:" at 60.11,-46.84 h1.14
  text "*UNLESS OTHERWISE NOTED" at 131.23,-46.84 h1.2
  text ".PCB_FILE_NAME_NO_PATH" at 58.84,-49.888 h1.78
  text "1:1" at -31.33,-50.015 h1.78
  text "-" at 22.01,-50.015 h1.78
  text "4" at -22.389,-55.349 h1.78
  text "3" at 47.486,-55.349 h1.78
  text "2" at 117.209,-55.349 h1.78
  text "1" at 187.076,-55.349 h1.78

## Text inside footprints (layer, text, board x,y; h text height)
D3: Bottom Overlay "-" at 8.04,18 h1.52 r180; Bottom Overlay "+" at 8.04,20.54 h1.52
D4: Bottom Overlay "-" at 8.04,48 h1.52 r180; Bottom Overlay "+" at 8.04,50.54 h1.52
D5: Bottom Overlay "-" at 91.96,30.27 h1.52; Bottom Overlay "+" at 91.96,27.73 h1.52 r180